# Altium PCB final_sensor_pcb_v3.PcbDoc (part 1 of 3)
Units mm, origin at the board's own origin, x right, y up, seen from the top; angles counter-clockwise.
Board outline 108.2 x 22.22 mm, 2 copper layers (Top Layer, Bottom Layer); 92 components, 55 nets, 247 pads, 83 vias.
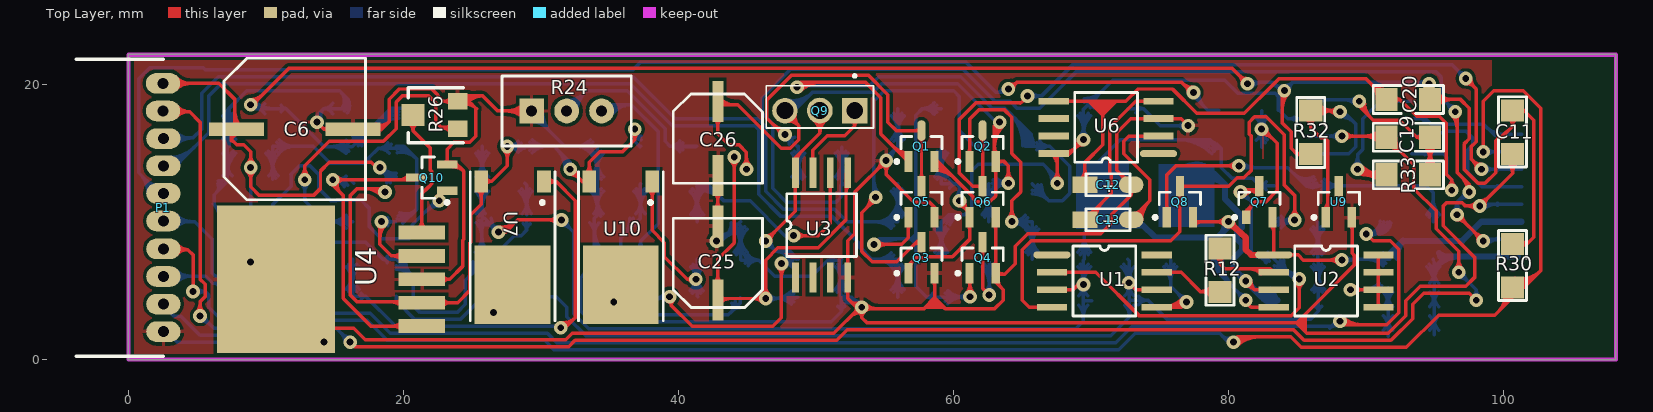
[diagram p0: Top Layer view]
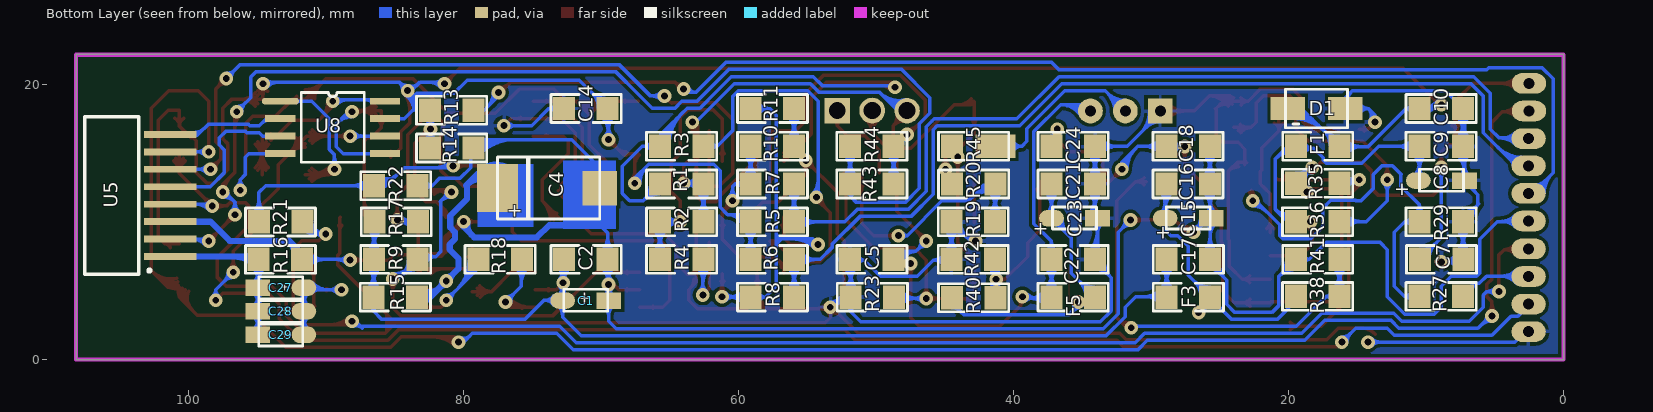
[diagram p1: Bottom Layer view, seen from below]

## Layer stack, top to bottom
Top Layer: signal copper 0.0356
Dielectric: dielectric 0.32, FR-4, Dk 4.8
Bottom Layer: signal copper 0.0356

## Board outline
0,22.225 108.204,22.225 108.204,0 0,0

## Design rules (kind name [scope] priority, off if disabled: settings)
Clearance [All] p1: gap=0.254
DiffPairsRouting [All] p1: maxlimit=0.254 minlimit=0.254 mostfreqgap=0.254 maxuncoupledlength=12.7
PolygonConnect [All] p1: connectstyle=Relief reliefconductorwidth=0.254 reliefentries=4 polygonreliefangle="90 Angle"
RoutingVias [All] p1: holewidth=0.5 width=1 viastyle="Through Hole" minholewidth=0.5 minwidth=1 maxholewidth=0.5 maxwidth=1
SilkscreenOverComponentPads [All] p1: minsilkscreentomaskgap=0.254
SolderMaskExpansion [All] p1: expansion=0.102
Width [All] p1: maxlimit=0.5 minlimit=0.15 preferedwidth=0.15
26 further rules are at their usual default settings.

## Classes and differential pairs
differential pair OUT: +OUT_P -OUT_N

## Components (designator, comment, footprint, x,y, rotation, side; value= is the part's Value field where it differs from the comment)
C1 "4.7uf" cap_smd_a 71.133,4.322 r180 bottom
C2 "100nF" 1206#1 71.095,7.264 r270 bottom
C4 "470uf" cap_smd_d 73.787,12.446 r0 bottom
C5 "100nf" 1206#1 50.292,7.264 r270 bottom
C6 "1000uf" c_cyl_smd 12.065,16.637 r180 top
C7 "100nf" 1206#1 8.89,7.315 r90 bottom
C8 "4.7uf" cap_smd_a 8.88,13.052 r180 bottom
C9 "100nf" 1206#1 8.918,15.545 r90 bottom
C10 "100nf" 1206#1 8.918,18.288 r90 bottom
C11 "100nf" 1206#1 100.711,16.574 r0 top
C12 "10uf" cap_smd_a 71.258,12.7 r180 top
C13 "10uf" cap_smd_a 71.258,10.16 r180 top
C14 "100nf" 1206#1 71.095,18.237 r270 bottom
C15 "4.7uf" cap_smd_a 27.305,10.308 r180 bottom
C16 "100nf" 1206#1 27.332,12.802 r90 bottom
C17 "100nf" 1206#1 27.305,7.315 r90 bottom
C18 "100nf" 1206#1 27.332,15.545 r90 bottom
C19 "Ceramic 330n" 1206#1 93.116,16.154 r270 top
C20 "100nf" 1206#1 93.116,18.898 r270 top
C21 "100nf" 1206#1 35.687,12.802 r90 bottom
C22 "100nf" 1206#1 35.687,7.315 r90 bottom
C23 "4.7uf" cap_smd_a 35.571,10.308 r180 bottom
C24 "100nf" 1206#1 35.687,15.545 r90 bottom
C25 "220uf" C_CYL_SMD2 43.076,7.112 r270 top
C26 "220uf" C_CYL_SMD2 42.672,16.002 r90 top
C27 "150nF" cap_smd_a 93.307,5.207 r0 bottom
C28 "150nF" cap_smd_a 93.307,3.492 r0 bottom
C29 "100nf" cap_smd_a 93.307,1.778 r0 bottom
D1 "SMBJ5" tvs 18.034,18.288 r90 bottom
F1 "Ferrite bead" 1206#1 17.87,15.494 r270 bottom
F3 "Ferrite bead" 1206#1 27.305,4.572 r90 bottom
F5 "Ferrite bead" 1206#1 35.687,4.572 r90 bottom
P1 "Header 10" PH_RIGHT_10 2.54,2.032 r90 top
Q1 "bc807" sot-23#1 57.658,15.494 r0 top
Q2 "bc807" sot-23#1 62.103,15.494 r0 top
Q3 "bc817" sot-23#2 57.658,7.366 r0 top
Q4 "bc817" sot-23#2 62.103,7.366 r0 top
Q5 "bc817" sot-23#2 57.658,11.43 r0 top
Q6 "bc817" sot-23#2 62.103,11.43 r0 top
Q7 "bc817" sot-23#3 82.233,11.43 r0 top
Q8 "bc817" sot-23#2 76.454,11.43 r0 top
Q9 "BD135" sot-32 50.292,18.415 r180 top
Q10 "bc817" sot-23#2 22.098,13.208 r90 top
R1 "10k" 1206#1 64.135,12.751 r270 bottom
R2 "10k" 1206#1 64.135,9.991 r270 bottom
R3 "1k" 1206#1 64.135,15.494 r270 bottom
R4 "1k" 1206#1 64.135,7.264 r270 bottom
R5 "0" 1206#1 57.531,9.991 r270 bottom
R6 "0" 1206#1 57.531,7.264 r270 bottom
R7 "470" 1206#1 57.531,12.751 r270 bottom
R8 "470" 1206#1 57.531,4.521 r270 bottom
R9 "18K" 1206#1 84.962,7.315 r90 bottom
R10 "10k" 1206#1 57.531,15.494 r270 bottom
R11 "10k" 1206#1 57.531,18.237 r270 bottom
R12 "100" 1206#1 79.375,6.489 r180 top
R13 "1K" 1206#1 80.898,18.161 r90 bottom
R14 "10K" 1206#1 80.898,15.418 r90 bottom
R15 "100" 1206#1 84.963,4.521 r270 bottom
R16 "1.5" 1206#1 93.32,7.264 r270 bottom
R17 "18K" 1206#1 84.924,10.042 r90 bottom
R18 "100" 1206#1 77.343,7.264 r270 bottom
R19 "10k" 1206#1 42.926,9.991 r270 bottom
R20 "10k" 1206#1 42.926,12.802 r90 bottom
R21 "1K" 1206#1 93.345,10.042 r90 bottom
R22 "10K" 1206#1 84.962,12.674 r90 bottom
R23 "10k" 1206#1 50.292,4.572 r90 bottom
R24 "RPot" pot 27.178,20.625 r270 top
R26 "RPot" "pot smd" 22.352,17.78 r90 top
R27 "1K" 1206#1 8.89,4.572 r270 bottom
R29 "1K" 1206#1 8.918,10.058 r90 bottom
R30 "10" 1206#1 100.711,6.858 r0 top
R32 "1k" 1206#1 85.979,16.51 r180 top
R33 "1.6k" 1206#1 93.091,13.462 r90 top
R35 "1K" 1206#1 17.907,12.849 r90 bottom
R36 "1K" 1206#1 17.907,10.058 r90 bottom
R38 "150" 1206#1 17.907,4.623 r90 bottom
R40 "100" 1206#1 42.926,4.521 r90 bottom
R41 "1.2k" 1206#1 17.87,7.265 r270 bottom
R42 "680" 1206#1 42.926,7.264 r270 bottom
R43 "680" 1206#1 50.329,12.802 r90 bottom
R44 "680" 1206#1 50.329,15.545 r90 bottom
R45 "0" 1206#2 42.926,15.545 r90 bottom
U1 "TC4428" sop8#1 70.993,5.842 r0 top
U2 "IRF7105" sop8#1 87.122,5.842 r0 top
U3 "LM358N" sop8#2 50.292,9.779 r90 top
U4 "TL1963AKTTR" tl1963 21.336,5.842 r90 top
U5 "HMC1001" HMC1001 103.251,11.938 r90 bottom
U6 "LMC7660IM" sop8#1 71.12,16.764 r180 top
U7 "LM1117T-ADJ" dpak 27.686,9.652 r270 top
U8 "AMP04" sop8#1 89.535,17.018 r180 bottom
U9 "LM4040" sot-23#2 88.011,11.43 r0 top
U10 "LM1117T-ADJ" dpak 35.56,9.652 r270 top

## Footprints (in the part's own frame and the unit in brackets; to place one, negate y for a bottom-side part, rotate by r counter-clockwise, add the part's x,y. Pads: shape width x height; smd on the part's side, far side on the other; paste and mask are expansions set on the pad)
1206#1 [mm]
  rect 1.7x1.6 smd: 1(-0.025,-1.6) 2(-0.025,1.563)
  silkscreen extent -1.04,-2.57 0.99,2.54, body extent -0.81,-1.68 0.79,1.68, height 1.1
1206#2 [mm]
  rect 1.7x2.9 smd: 1(-0.025,-1.6)
  rect 1.7x1.6 smd: 2(-0.025,1.563)
  silkscreen extent -1.04,-2.57 0.99,2.54, body extent -0.81,-1.68 0.79,1.68, height 1.1
c_cyl_smd [mm]
  rect 4x1 smd: 1(4.191,-0.127) 2(-4.267,-0.127)
  silkscreen extent -5.18,-5.28 5.12,5.02, body extent -5.18,-5.28 5.12,5.02, height 10
C_CYL_SMD2 [mm]
  rect 3x0.8 smd: 1(2.769,-0.203) 2(-2.616,-0.203)
  silkscreen extent -3.18,-3.45 3.32,3.05, body extent -3.18,-3.45 3.32,3.05, height 5
cap_smd_a [mm]
  oval 1.8x1.2 smd: 1(-1.676,-0.025)
  rect 1.8x1.2 smd: 2(1.676,-0.025)
  silkscreen extent -1.6,-0.81 1.6,0.79
cap_smd_d [mm]
  rect 3x3.5 smd: 1(3.767,-0.025)
  rect 2.5x2.5 smd: 2(-3.683,-0.025)
  silkscreen extent -3.68,-2.29 3.77,2.21
dpak [mm]
  rect 1.6x1 smd: 1(-3.319,2.539) 3(-3.319,-2.031)
  rect 5.7x5.5 smd: 2(4.208,0.254)
  silkscreen extent -4.02,-2.83 6.83,3.34
HMC1001 [mm]
  rect 0.5x3.81 smd: 1(-4.445,-1.905) 2(-3.175,-1.905) 3(-1.905,-1.905) 4(-0.635,-1.905) 5(0.635,-1.905) 6(1.905,-1.905) 7(3.175,-1.905) 8(4.445,-1.905)
  silkscreen extent -5.71,-0.48 5.71,4.32
PH_RIGHT_10 [mm]
  oval 1.5x2.5 hole 0.8: 1(0,0) 2(2.007,0) 3(4.013,0) 4(6.02,0) 5(8.052,0) 6(10.058,0) 7(12.065,0) 8(14.046,0) 9(16.053,0.025) 10(18.059,0.025)
  silkscreen extent -1.78,0 19.81,6.35
pot [mm]
  rect 1.8x1.8 hole 0.8: 1(2.54,2.159)
  round 1.8 hole 0.8: 2(2.54,4.699) 3(2.54,7.239)
  silkscreen extent 0,0 5.08,9.4
"pot smd" [mm]
  rect 1.2x1.4 smd: 1(-1,-1.6) 3(1,-1.6)
  rect 1.6x1.7 smd: 2(0,1.65)
  silkscreen extent -2,-2 2,2
sop8#1 [mm]
  oval 2.7x0.5 smd: 1(-3.81,1.778)
  rect 2.2x0.5 smd: 2(-3.81,0.508) 3(-3.81,-0.762) 4(-3.81,-2.032) 5(3.806,-2.032) 6(3.806,-0.762) 7(3.806,0.508) 8(3.806,1.778)
  silkscreen extent -2.29,-2.67 2.29,2.41
sop8#2 [mm]
  rect 2.2x0.5 smd: 1(-3.81,1.778) 2(-3.81,0.508) 3(-3.81,-0.762) 4(-3.81,-2.032) 5(3.806,-2.032) 6(3.806,-0.762) 7(3.806,0.508) 8(3.806,1.778)
  silkscreen extent -2.29,-2.67 2.29,2.41
sot-23#1 [mm]
  rect 0.6x1.5 smd: 1(-0.919,-1.081) 2(0.981,-1.081)
  oval 0.6x1.5 smd: 3(0.031,1.169)
  silkscreen extent -1.89,-1.21 1.53,0.74, body extent -1.42,-1.18 1.48,1.12, height 1
sot-23#2 [mm]
  rect 0.6x1.5 smd: 1(-0.919,-1.081) 2(0.981,-1.081) 3(0.031,1.169)
  silkscreen extent -1.89,-1.21 1.53,0.74, body extent -1.42,-1.18 1.48,1.12, height 1
sot-23#3 [mm]
  rect 0.6x1 smd: 1(-0.919,-1.081)
  rect 0.6x1.5 smd: 2(0.981,-1.081) 3(0.031,1.169)
  silkscreen extent -1.89,-1.21 1.53,0.74, body extent -1.42,-1.18 1.48,1.12, height 1
sot-32 [mm]
  rect 1.85x1.85 hole 1.23: 1(-2.54,0.305)
  round 1.88 hole 1.25: 2(0,0.305)
  round 1.85 hole 1.23: 3(2.54,0.305)
  silkscreen extent -3.9,-2.32 3.9,1.56
tl1963 [mm]
  rect 1x3.4 smd: 1(-3.4,0) 2(-1.7,0) 3(0,0) 4(1.7,0) 5(3.4,0)
  rect 10.7x8.6 smd: 3(0,10.6)
tvs [mm]
  rect 1.7x2.5 smd: 1(-0.025,-2.159) 2(-0.025,2.032)
  silkscreen extent -1.42,-2.32 1.38,2.18, body extent -1.5,-2.76 1.42,2.74, height 2.23

## Part data
C1 C8 C12 C13 C15 C23 C27 C28 C29: library part "Cap Pol1", "Polarized Capacitor (Radial)"
C2 C5 C7 C9 C10 C11 C14 C16 C17 C18 C19 C20 C21 C22 C24: library part Cap, "Capacitor"
C4: library part "Cap Pol1", "TAN CAP D SIZE"
C6: library part "Cap Pol1", "electrolytic smd cap"
C25 C26: library part "Cap Pol1", "electrolytic smd cap 16V"
D1: library part "Diode 10TQ040", "tvs"
F1 F3 F5: library part Inductor, "Ferrite bead, 1206"
P1: "Header, 10-Pin"
Q1 Q2: library part 2N3906, "PNP General Purpose Amplifier"
Q3 Q4 Q5 Q6 Q7 Q8 Q9 Q10: library part 2N3904, "NPN General Purpose Amplifier"
R1 R2 R3 R4 R5 R6 R7 R8 R9 R10 R11 R12 R13 R14 R15 R16 R17 R18 R19 R20 R21 R22 R23 R27 R29 R35 R43 R44 R45: library part Res1, "Resistor"
R24 R26: "Potentiometer"
R30 R32 R36 R38 R40 R41 R42: library part Resistor, "Resistor, 1/4W"
R33: library part Resistor, "General Resistor"
U2: library part IRF7106
U3: "Dual Low-Power Operational Amplifier"
U4: library part TL1963
U6: "Switched Capacitor Voltage Converter"
U7 U10: "800mA Low-Dropout Linear Regulator"
U8: library part "Op Amp"
U9: "Precision Micropower Shunt Voltage Reference, 3-pin SOT-23"

## Via types
v1: diameter 1, hole 0.5, Top Layer to Bottom Layer, 83 vias

## Nets (pads, with @x,y where several pads share a name; then routed paths per layer and width w, separated by ;. In a path a pad name is that pad's centre, name@x,y a point inside that pad or via, vN(x,y) a via of type N, cw(c..) or ccw(c..) an arc to the next point about the centre after c; other vN are vias at no path point)
5V0: C10.2 C11.2 C14.2 C20.2 D1.2 F1.2 R5.1 R6.1 R30.2 R32.2 U6.8 U8.7 | length 254.2
  Top Layer w0.254: v1@8.89,18.661 ccw(c8.89,19.255) 9.31,18.835 ; v1@8.89,18.915 ccw(c8.89,20.122) 9.744,19.269 ; v1@9.144,18.669 11.684,21.209 80.264,21.209 v1(81.407,20.066) ; v1@9.263,18.542 cw(c9.857,18.542) 9.437,18.962 ; U6.8@67.227,14.899 cw(c66.414,14.086) 67.564,14.086 ; v1@67.3,13.091 ccw(c66.664,13.727) 67.564,13.727 ccw(c68.464,13.727) v1@67.828,13.091 ; U6.8@67.407,15.079 cw(c67.027,14.699) 67.564,14.699 ; v1(67.564,12.827) 67.564,14.736 U6.8@67.314,14.986 68.453,14.986 ; U6.8@68.164,14.855 ccw(c68.164,15.236) 68.434,14.967 ; U6.8@68.164,15.109 ccw(c68.164,16.104) 68.867,15.4 ; U6.8@68.253,14.901 cw(c68.453,14.708) 68.453,14.986 ; U6.8@68.253,15.071 ccw(c68.453,15.264) 68.453,14.986 ; v1@69.096,16.002 cw(c68.196,16.002) 68.832,15.365 cw(c69.469,14.729) v1@69.469,15.629 ; v1(69.469,16.002) 68.453,14.986 ; v1@81.034,20.066 ccw(c80.134,20.066) 80.77,20.703 ccw(c81.407,21.339) v1@81.407,20.439 ; v1@83.819,19.302 cw(c83.51,18.993) 83.947,18.993 ; 83.947,18.338 cw(c85.311,18.338) v1@84.346,19.302 ; 83.947,18.951 cw(c84.698,18.951) v1@84.167,19.482 ; v1@83.947,19.431 83.947,17.204 84.582,16.569 84.582,15.367 85.002,14.947 ; R32.2@85.32,14.722 ccw(c85.002,14.61) 85.002,14.947 ; R32.2@85.32,15.172 cw(c85.002,15.285) 85.002,14.947 ; R32.2@86.004,14.947 85.002,14.947 ; C20.2@94.275,19.511 ccw(c93.762,20.193) v1@94.615,20.193 ; v1@94.351,19.802 cw(c93.715,19.166) 94.615,19.166 cw(c95.515,19.166) v1@94.879,19.802 ; C20.2@94.615,18.987 v1@94.615,20.193 ; C20.2@94.615,19.773 ccw(c95.099,19.773) C20.2@94.874,19.344 ; C20.2@94.679,18.923 96.901,18.923 97.536,18.288 97.536,16.061 97.155,15.68 97.155,13.843 98.171,12.827 98.679,12.827 99.455,13.603 99.455,15.932 99.678,16.155 99.848,16.155 100.686,16.993 ; C20.2@94.975,18.627 cw(c95.691,17.912) 95.691,18.923 cw(c95.691,19.935) C20.2@94.975,19.219 ; C20.2@94.992,19.569 cw(c95.32,20.193) v1@94.615,20.193 ; C20.2@95.155,18.447 cw(c96.304,17.298) 96.304,18.923 cw(c96.304,20.548) C20.2@95.155,19.399 ; C11.2@100.358,17.549 cw(c100.049,16.993) 100.686,16.993 ; R30.2@100.686,8.421 101.766,8.421 ; C11.2@101.013,17.549 ccw(c101.322,16.993) 100.686,16.993 ; R30.2@101.352,8.15 cw(c101.766,7.969) 101.766,8.421 ; R30.2@101.352,8.691 ccw(c101.766,8.873) 101.766,8.421 ; 100.686,16.993 C11.2@100.686,18.137 101.497,18.137 102.235,17.399 102.235,8.89 101.766,8.421
  Bottom Layer w0.254: v1(8.89,18.542) v1@9.144,18.288 ; v1@8.974,18.626 ccw(c9.852,19.504) C10.2@9.852,18.263 ; v1@9.154,18.806 ccw(c10.465,20.117) C10.2@10.465,18.263 ; C10.2@9.915,17.898 ccw(c9.246,17.467) v1@9.246,18.263 ; C10.2@9.915,18.627 cw(c9.246,19.059) v1@9.246,18.263 ; C10.2@10.773,18.263 C10.2@10.48,18.263 ; C10.2@11.11,18.024 cw(c11.455,17.893) 11.455,18.263 ; C10.2@11.11,18.501 ccw(c11.455,18.632) 11.455,18.263 ; 14.623,15.494 cw(c14.623,13.786) F1.2@15.831,14.994 ; 14.741,15.494 ccw(c14.741,17.035) F1.2@15.831,15.945 ; 15.236,15.494 cw(c15.236,14.399) F1.2@16.011,15.173 ; 15.354,15.494 ccw(c15.354,16.422) F1.2@16.011,15.766 ; F1.2@16.256,15.494 14.224,15.494 11.455,18.263 ; F1.2@16.307,15.519 19.075,18.288 D1.2@20.066,18.288 ; F1.2@16.307,15.988 ccw(c16.307,17.121) 17.107,16.32 ; F1.2@16.307,16.242 ccw(c16.307,17.988) 17.541,16.754 ; F1.2@16.726,15.569 cw(c17.617,15.569) F1.2@16.987,16.199 ; F1.2@16.98,15.569 cw(c18.484,15.569) 17.42,16.633 ; 17.38,16.593 cw(c19.666,14.307) D1.2@19.666,17.54 ; 17.814,17.026 cw(c19.666,15.174) D1.2@19.666,17.794 ; 18.247,17.46 cw(c19.666,16.041) D1.2@19.666,18.048 ; 18.681,17.894 cw(c19.666,16.908) D1.2@19.666,18.302 ; R6.1@58.655,7.816 ccw(c57.506,8.965) 59.131,8.965 ccw(c60.756,8.965) R6.1@59.607,7.816 ; R5.1@58.655,9.491 cw(c57.506,8.342) 59.131,8.342 cw(c60.756,8.342) R5.1@59.607,9.491 ; R6.1@58.835,7.636 ccw(c58.12,8.351) 59.131,8.351 ccw(c60.143,8.351) R6.1@59.427,7.636 ; R5.1@58.835,9.67 cw(c58.12,8.955) 59.131,8.955 cw(c60.143,8.955) R5.1@59.427,9.67 ; R6.1@59.131,7.29 R5.1@59.131,10.017 59.664,10.549 60.817,10.549 ; R5.1@59.285,10.007 cw(c60.076,9.701) 60.076,10.549 ; R5.1@59.522,9.915 cw(c60.446,9.558) 60.446,10.549 ; R5.1@59.759,9.824 cw(c60.817,9.415) 60.817,10.549 ; 66.658,14.114 cw(c65.371,12.827) v1@67.191,12.827 ; 67.091,13.681 cw(c66.238,12.827) v1@67.445,12.827 ; v1(67.564,12.827) 67.564,13.208 66.548,14.224 61.831,14.224 61.341,13.734 61.341,11.073 60.817,10.549 ; C14.2@69.056,17.737 cw(c68.059,16.74) 69.469,16.74 ; v1@69.205,16.266 ccw(c68.569,16.902) 69.469,16.902 ccw(c70.369,16.902) v1@69.733,16.266 ; C14.2@69.236,17.916 cw(c68.672,17.353) 69.469,17.353 ; v1@69.469,16.436 cw(c71.308,16.436) C14.2@70.008,17.737 ; 69.469,17.049 cw(c70.695,17.049) C14.2@69.828,17.916 ; C14.2@69.532,18.732 ccw(c69.532,19.864) 70.332,19.063 ; C14.2@69.532,18.986 ccw(c69.532,20.731) 70.766,19.497 ; v1@69.596,16.002 v1(69.469,16.002) 69.469,18.2 C14.2@69.532,18.263 71.589,20.32 79.756,20.32 80.709,19.367 83.418,19.367 83.641,19.143 ; C14.2@69.951,18.313 cw(c70.842,18.313) C14.2@70.212,18.942 ; C14.2@70.205,18.313 cw(c71.709,18.313) 70.645,19.376 ; v1@81.491,19.982 cw(c82.001,19.472) 82.001,20.193 cw(c82.001,20.66) v1@81.671,20.33 ; v1@81.534,20.193 83.185,20.193 v1@83.812,19.566 ; v1@81.671,19.802 cw(c82.614,18.859) 82.614,20.193 ; 83.32,20.058 ccw(c83.749,20.486) v1@83.955,19.917 ; 83.603,19.775 ccw(c83.899,20.072) v1@84.042,19.678 ; 83.641,18.143 cw(c84.92,18.143) v1@84.272,19.244 ; 83.641,18.587 cw(c84.659,18.587) v1@84.143,19.463 ; 83.641,19.031 cw(c84.398,19.031) v1@84.014,19.682 ; v1@84.064,19.566 83.641,19.143 ; v1(84.083,19.566) 84.71,20.193 ; v1@84.087,19.939 ccw(c84.096,20.806) 84.71,20.193 ; v1@84.456,19.57 cw(c85.323,19.58) 84.71,20.193 ; U8.7@84.792,17.439 ccw(c84.582,17.229) 84.582,17.526 ccw(c84.582,17.823) U8.7@84.792,17.613 ; U8.7@85.729,17.526 84.328,17.526 83.641,18.213 83.641,19.143 ; 93.408,20.193 cw(c93.408,18.859) v1@94.351,19.802 ; v1@94.351,20.33 cw(c94.021,20.66) 94.021,20.193 cw(c94.021,19.472) v1@94.531,19.982 ; v1@94.615,20.193 84.71,20.193 ; v1@9.246,18.263 C10.2@10.48,18.263 ; C10.2@10.48,18.263 11.455,18.263
  other v1: 94.615,20.066
9V7: C5.2 C22.2 F5.2 Q9.2 R24.3 U3.8 | length 87.4
  Top Layer w0.254: v1@39.276,4.211 cw(c39.201,3.924) 39.497,3.924 ; 39.497,3.978 cw(c39.964,3.978) v1@39.634,4.308 ; v1@39.497,4.572 39.497,3.937 41.021,2.413 46.863,2.413 47.498,3.048 v1(47.498,6.985) ; v1(46.355,8.636) 48.514,10.795 U3.8@48.514,13.585 48.514,14.688 ; v1@46.355,9.009 ccw(c46.355,9.909) 46.992,9.273 ccw(c47.628,8.636) v1@46.728,8.636 ; v1@47.234,6.721 cw(c46.598,6.085) 47.498,6.085 cw(c48.398,6.085) v1@47.762,6.721 ; U3.8@48.427,12.648 cw(c48.217,12.438) 48.514,12.438 cw(c48.811,12.438) U3.8@48.601,12.648 ; U3.8@48.438,14.532 ccw(c48.314,14.688) 48.514,14.688 ; U3.8@48.59,14.532 cw(c48.714,14.688) 48.514,14.688 ; U3.8@48.637,14.435 cw(c49.546,14.435) 48.903,15.078 ; Q9.2@49.799,17.464 cw(c49.037,16.466) 50.292,16.466 ; Q9.2@49.953,17.666 cw(c49.429,16.98) 50.292,16.98 cw(c51.155,16.98) Q9.2@50.631,17.666 ; Q9.2@50.292,18.161 Q9.2@50.292,18.11 50.292,16.466 ; Q9.2@50.785,17.464 ccw(c51.547,16.466) 50.292,16.466 ; 48.514,14.688 50.292,16.466
  Bottom Layer w0.254: R24.3@34.417,18.034 34.925,18.542 36.576,18.542 ; R24.3@34.426,18.079 cw(c35.238,17.598) 35.238,18.542 ; R24.3@34.645,17.95 cw(c35.684,17.334) 35.684,18.542 ; R24.3@34.863,17.82 cw(c36.13,17.07) 36.13,18.542 ; R24.3@35.082,17.691 cw(c36.576,16.805) 36.576,18.542 ; F5.2@36.774,5.073 ccw(c35.625,6.221) 37.25,6.221 ccw(c38.875,6.221) F5.2@37.726,5.073 ; C22.2@36.774,6.764 cw(c35.625,5.615) 37.25,5.615 cw(c38.875,5.615) C22.2@37.726,6.764 ; C22.2@36.876,7.9 ccw(c36.41,8.598) 37.25,8.598 ; F5.2@36.954,4.893 ccw(c36.238,5.608) 37.25,5.608 ccw(c38.261,5.608) F5.2@37.546,4.893 ; C22.2@36.954,6.944 cw(c36.238,6.228) 37.25,6.228 cw(c38.261,6.228) C22.2@37.546,6.944 ; F5.2@37.546,4.2 cw(c38.137,3.61) 38.137,4.445 ; F5.2@37.546,4.793 ccw(c38.386,5.633) 38.386,4.445 ; C22.2@37.623,7.9 cw(c38.089,8.598) 37.25,8.598 ; F5.2@37.726,4.021 cw(c38.75,2.997) 38.75,4.445 ; F5.2@37.726,4.973 ccw(c38.999,6.246) v1@38.999,4.445 ; 38.163,4.445 ccw(c38.163,5.779) v1@39.106,4.836 ; v1@39.106,4.308 ccw(c38.776,3.978) 38.776,4.445 ccw(c38.776,5.166) v1@39.286,4.656 ; v1@39.497,4.445 37.351,4.445 F5.2@37.25,4.547 C22.2@37.25,7.29 37.25,8.598 ; v1@46.355,8.263 cw(c46.355,7.363) 46.992,7.999 cw(c47.628,8.636) v1@46.728,8.636 ; v1(46.355,8.636) 47.117,7.874 ; 47.456,7.874 cw(c47.456,6.966) C5.2@48.327,7.222 ; v1@47.72,6.985 cw(c47.72,6.23) C5.2@48.253,6.764 ; v1@47.764,6.724 cw(c48.387,6.112) C5.2@48.387,6.985 ; v1@47.764,7.246 ccw(c48.387,7.858) C5.2@48.387,6.985 ; 47.795,7.874 cw(c47.795,7.066) C5.2@48.571,7.293 ; v1@47.835,6.985 ccw(c47.835,7.496) C5.2@48.326,7.355 ; C5.2@48.082,7.425 cw(c47.498,7.593) v1(47.498,6.985) C5.2@48.387,6.985 ; C5.2@48.083,7.15 ccw(c47.117,6.867) 47.117,7.874 ; C5.2@48.729,7.29 48.145,7.874 47.117,7.874 ; 36.576,18.542 38.528,16.59 38.528,9.877 37.25,8.598
  other v1: 39.37,4.572
11V3: C1.1 C2.1 C17.2 F3.2 R9.2 R15.1 R17.2 U1.6 | length 119
  Top Layer w0.254: v1(72.771,5.588) 73.279,5.08 U1.6@74.799,5.08 ; U1.6@73.862,4.993 ccw(c73.652,4.783) 73.652,5.08 ccw(c73.652,5.377) U1.6@73.862,5.167
  Bottom Layer w0.254: F3.2@28.392,5.073 ccw(c27.243,6.221) 28.868,6.221 ccw(c30.493,6.221) 29.344,5.073 ccw(c30.552,6.281) 30.552,4.572 ; C17.2@28.392,6.764 cw(c27.243,5.615) 28.868,5.615 cw(c30.493,5.615) C17.2@29.344,6.764 ; F3.2@28.572,4.893 ccw(c27.856,5.608) 28.868,5.608 ccw(c29.879,5.608) 29.164,4.893 ccw(c29.939,5.668) 29.939,4.572 ; C17.2@28.572,6.944 cw(c27.856,6.228) 28.868,6.228 cw(c29.879,6.228) C17.2@29.164,6.944 ; F3.2@28.868,4.547 C17.2@28.868,7.29 C17.2@29.388,7.29 ; F3.2@28.956,4.572 31.115,4.572 31.877,3.81 31.877,3.405 31.89,3.392 31.89,3.118 33.281,1.727 71.45,1.727 72.809,3.086 C1.1@72.809,4.297 72.809,7.175 C2.1@72.695,7.29 ; F3.2@29.164,4.3 cw(c29.82,3.645) 29.82,4.572 ; F3.2@29.344,4.121 cw(c30.433,3.031) 30.433,4.572 ; C2.1@72.219,6.764 cw(c70.794,5.339) v1@72.809,5.339 ; C2.1@72.399,6.943 cw(c71.408,5.952) v1@72.809,5.952 ; C1.1@72.475,3.962 cw(c71.667,3.155) 72.809,3.155 cw(c73.951,3.155) C1.1@73.143,3.962 ; C1.1@72.475,4.631 ccw(c71.667,5.439) 72.809,5.439 ccw(c73.951,5.439) C1.1@73.143,4.631 ; v1@72.507,5.324 cw(c71.779,4.596) C1.1@72.809,4.596 ; v1@72.507,5.852 ccw(c71.779,6.58) C2.1@72.809,6.58 ; C1.1@72.809,4.779 cw(c73.58,4.779) v1@73.035,5.324 ; v1@72.809,5.891 cw(c74.044,5.891) C2.1@73.171,6.764 ; 72.809,6.397 ccw(c73.58,6.397) v1@73.035,5.852 ; C1.1@72.898,4.318 74.168,4.318 ; C1.1@73.45,4.624 ccw(c74.168,5.312) 74.168,4.318 ; C1.1@73.472,3.993 cw(c74.168,3.41) 74.168,4.318 ; 79.107,2.921 79.248,2.921 ; R17.2@86.011,9.491 cw(c84.772,8.252) 86.524,8.252 ; R9.2@86.049,6.764 cw(c84.806,5.521) 86.563,5.521 ; R9.2@86.049,7.815 ccw(c84.9,8.964) 86.524,8.964 ccw(c88.149,8.964) R9.2@87,7.815 ; R15.1@86.087,5.072 ccw(c84.938,6.221) 86.563,6.221 ccw(c88.188,6.221) R15.1@87.039,5.072 ; R17.2@86.191,9.67 cw(c85.385,8.865) 86.524,8.865 ; R9.2@86.228,6.943 cw(c85.419,6.134) 86.563,6.134 ; R9.2@86.228,7.636 ccw(c85.513,8.351) 86.524,8.351 ccw(c87.536,8.351) R9.2@86.821,7.636 ; R15.1@86.267,4.893 ccw(c85.552,5.608) 86.563,5.608 ccw(c87.575,5.608) R15.1@86.859,4.893 ; R15.1@86.315,3.871 cw(c86.17,3.505) 86.563,3.505 ; R17.2@86.487,10.017 86.524,9.979 R9.2@86.524,7.29 86.563,7.251 R15.1@86.563,4.547 86.563,3.505 ; 86.524,8.432 cw(c88.021,8.432) R17.2@86.963,9.491 ; 86.524,9.045 cw(c87.408,9.045) R17.2@86.783,9.67 ; 86.563,5.708 cw(c88.056,5.708) R9.2@87,6.764 ; 86.563,6.322 cw(c87.442,6.322) R9.2@86.821,6.943 ; R15.1@86.812,3.871 ccw(c86.957,3.505) 86.563,3.505 ; 74.168,4.318 75.565,2.921 79.248,2.921 ; 79.248,2.921 85.979,2.921 86.563,3.505
-5V0: C12.2 C20.1 U6.5 U8.4 | length 59.3
  Top Layer w0.254: U6.5@67.314,18.796 69.85,18.796 ; U6.5@68.251,18.709 cw(c68.461,18.499) 68.461,18.796 cw(c68.461,19.093) U6.5@68.251,18.883 ; C12.2@69.247,13.06 ccw(c68.44,13.867) 69.582,13.867 ccw(c70.724,13.867) C12.2@69.916,13.06 ; C12.2@69.582,12.725 69.582,14.337 70.866,15.621 70.866,17.78 69.85,18.796 ; 83.21,19.939 83.261,19.99 ; 90.282,20.157 ccw(c91.516,21.392) C20.1@91.516,19.646 ; 90.403,20.037 cw(c89.339,18.973) C20.1@90.843,18.973 ; 90.716,19.724 ccw(c91.516,20.524) C20.1@91.516,19.392 ; C20.1@90.836,19.603 cw(c90.206,18.973) C20.1@91.097,18.973 ; C20.1@92.146,18.685 cw(c92.49,18.555) 92.49,18.923 ; C20.1@92.146,19.161 ccw(c92.49,19.292) 92.49,18.923 ; 95.86,14.469 95.86,17.188 95.356,17.692 93.721,17.692 92.49,18.923 ; 95.872,14.456 95.872,13.475 96.266,13.081 ; v1@96.037,12.614 ccw(c95.674,13.081) 96.266,13.081 ; v1(96.266,12.319) 96.266,13.081 ; v1@96.495,12.614 cw(c96.858,13.081) 96.266,13.081 ; 69.85,18.796 72.561,18.796 73.45,19.685 75.946,19.685 77.724,17.907 81.178,17.907 83.261,19.99 ; 83.261,19.99 83.718,20.447 84.448,20.447 89.992,20.447 C20.1@91.516,18.923 92.49,18.923
  Bottom Layer w0.254: U8.4@93.345,14.986 95.631,14.986 95.885,14.732 95.885,13.462 96.266,13.081 ; U8.4@94.282,14.899 cw(c94.492,14.689) 94.492,14.986 cw(c94.492,15.283) U8.4@94.282,15.073 ; v1@96.037,12.614 ccw(c95.674,13.081) 96.266,13.081 ; v1(96.266,12.319) 96.266,13.081 ; v1@96.495,12.614 cw(c96.858,13.081) 96.266,13.081
ADS_IN: C19.1 P1.2 U8.6 | length 137.2
  Top Layer w0.254: v1(16.129,1.27) 16.47,0.929 32.019,0.929 32.487,1.397 51.518,1.397 52.28,2.159 84.753,2.159 85.515,1.397 91.841,1.397 93.425,2.981 93.425,4.017 94.234,4.826 97.536,4.826 v1(98.044,4.318) ; v1(88.265,16.256) 91.44,16.256 C19.1@91.516,16.18 93.51,14.186 93.51,12.429 95.123,10.816 95.123,9.525 96.774,7.874 v1(96.774,6.35) ; v1@88.529,15.992 cw(c89.165,15.356) 89.165,16.256 cw(c89.165,17.156) v1@88.529,16.52 ; 89.828,16.256 cw(c89.828,14.542) C19.1@91.04,15.754 ; 89.955,16.256 ccw(c89.955,17.791) C19.1@91.04,16.706 ; 90.441,16.256 cw(c90.441,15.155) C19.1@91.22,15.934 ; 90.568,16.256 ccw(c90.568,17.178) C19.1@91.22,16.526 ; C19.1@91.516,15.457 cw(c91.516,13.711) 92.75,14.946 ; C19.1@91.516,15.711 cw(c91.516,14.579) 92.317,15.379 ; C19.1@91.935,16.13 ccw(c92.826,16.13) C19.1@92.196,15.5 ; C19.1@92.189,16.13 ccw(c93.693,16.13) 92.63,15.066 ; v1@96.51,6.614 ccw(c95.874,7.25) 96.774,7.25 ccw(c97.674,7.25) v1@97.038,6.614
  Bottom Layer w0.254: P1.2@2.794,3.937 2.794,3.683 3.314,3.163 3.822,3.163 5.207,1.778 12.319,1.778 12.827,2.286 15.113,2.286 v1(16.129,1.27) ; v1@15.756,1.27 ccw(c14.856,1.27) 15.492,1.907 ccw(c16.129,2.543) v1@16.129,1.643 ; U8.6@85.729,16.256 v1@88.011,16.256 ; U8.6@86.666,16.169 cw(c86.876,15.959) 86.876,16.256 cw(c86.876,16.553) U8.6@86.666,16.343 ; v1@88.001,15.992 ccw(c87.365,15.356) 87.365,16.256 ccw(c87.365,17.156) v1@88.001,16.52 ; v1@96.774,5.977 cw(c96.774,5.077) 97.411,5.713 cw(c98.047,6.35) v1@97.147,6.35 ; v1(96.774,6.35) 98.044,5.08 ; v1@97.815,4.613 ccw(c97.452,5.08) 98.044,5.08 ; v1(98.044,4.318) 98.044,5.08 ; v1@98.273,4.613 cw(c98.636,5.08) 98.044,5.08